# Altium PCB imu_evo.PcbDoc (part 1 of 2)
Units mil, origin at the board's own origin, x right, y up, seen from the top; angles counter-clockwise.
Board outline 2362.2 x 1574.8 mil, 3 copper layers (Top Layer, Mid-Layer 1, Bottom Layer); 55 components, 35 nets, 218 pads, 127 vias.
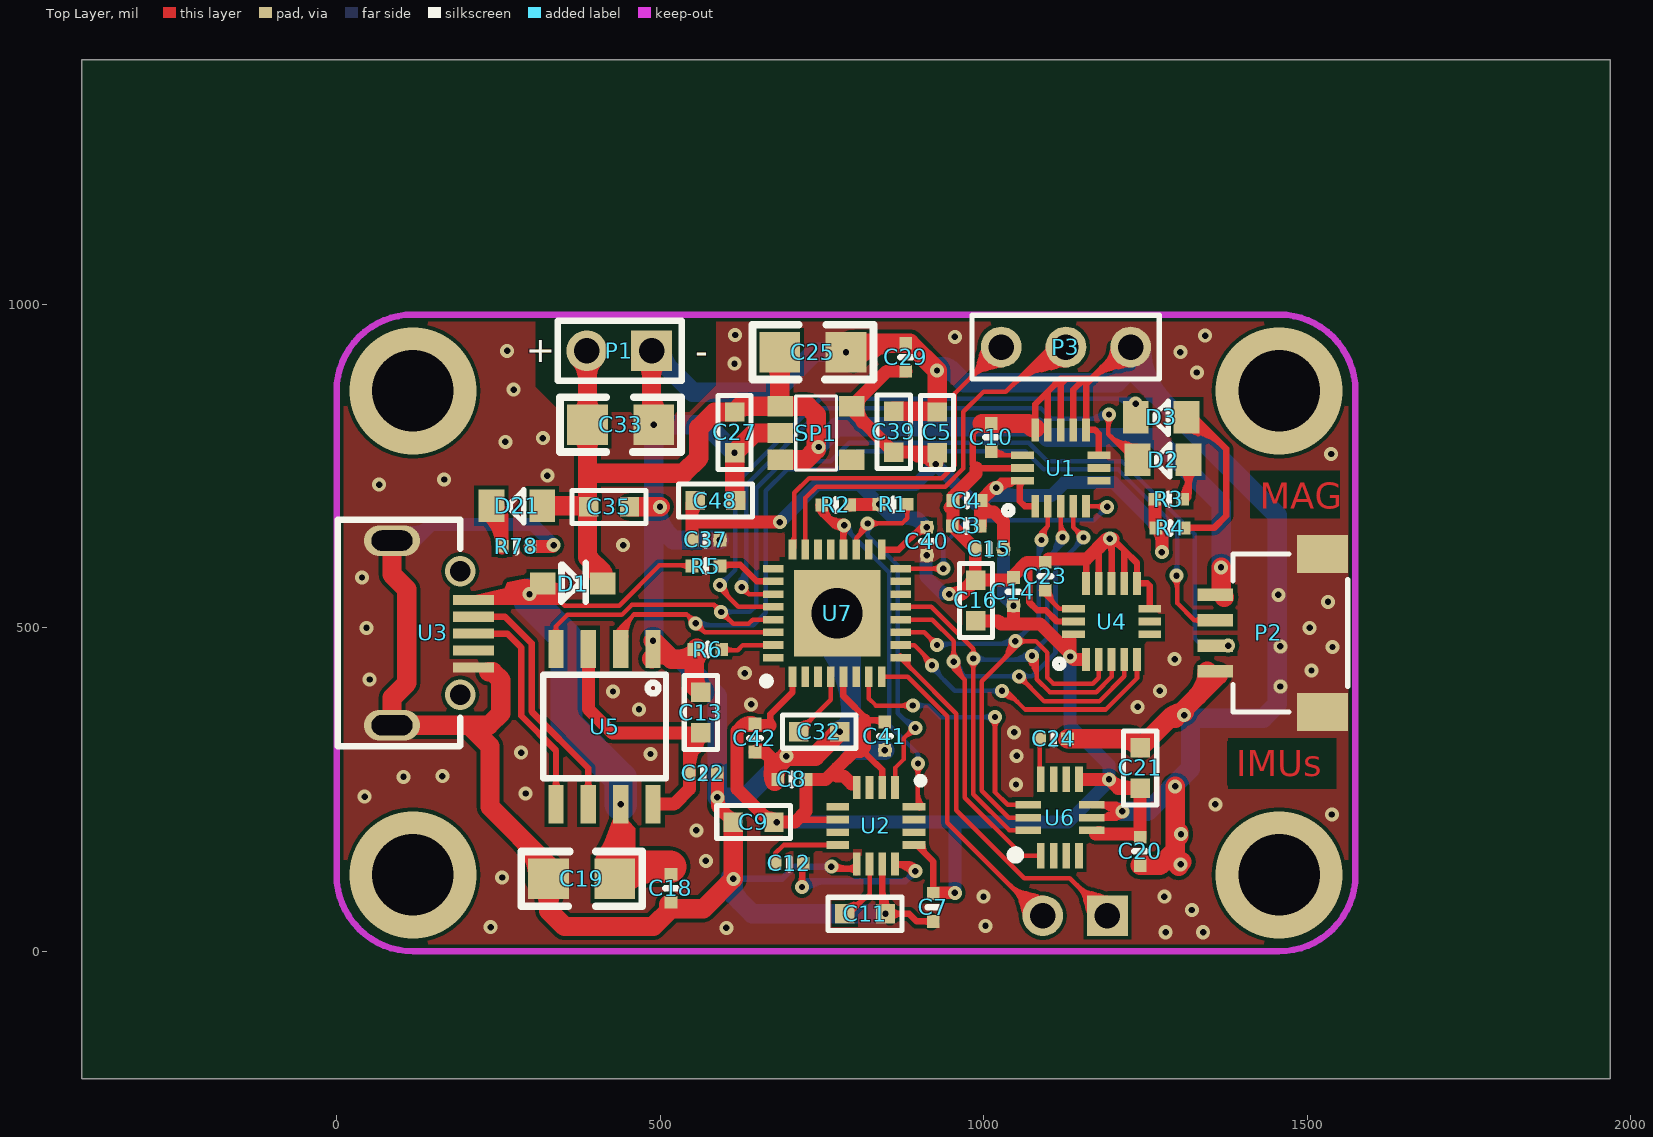
[diagram p0: Top Layer view]
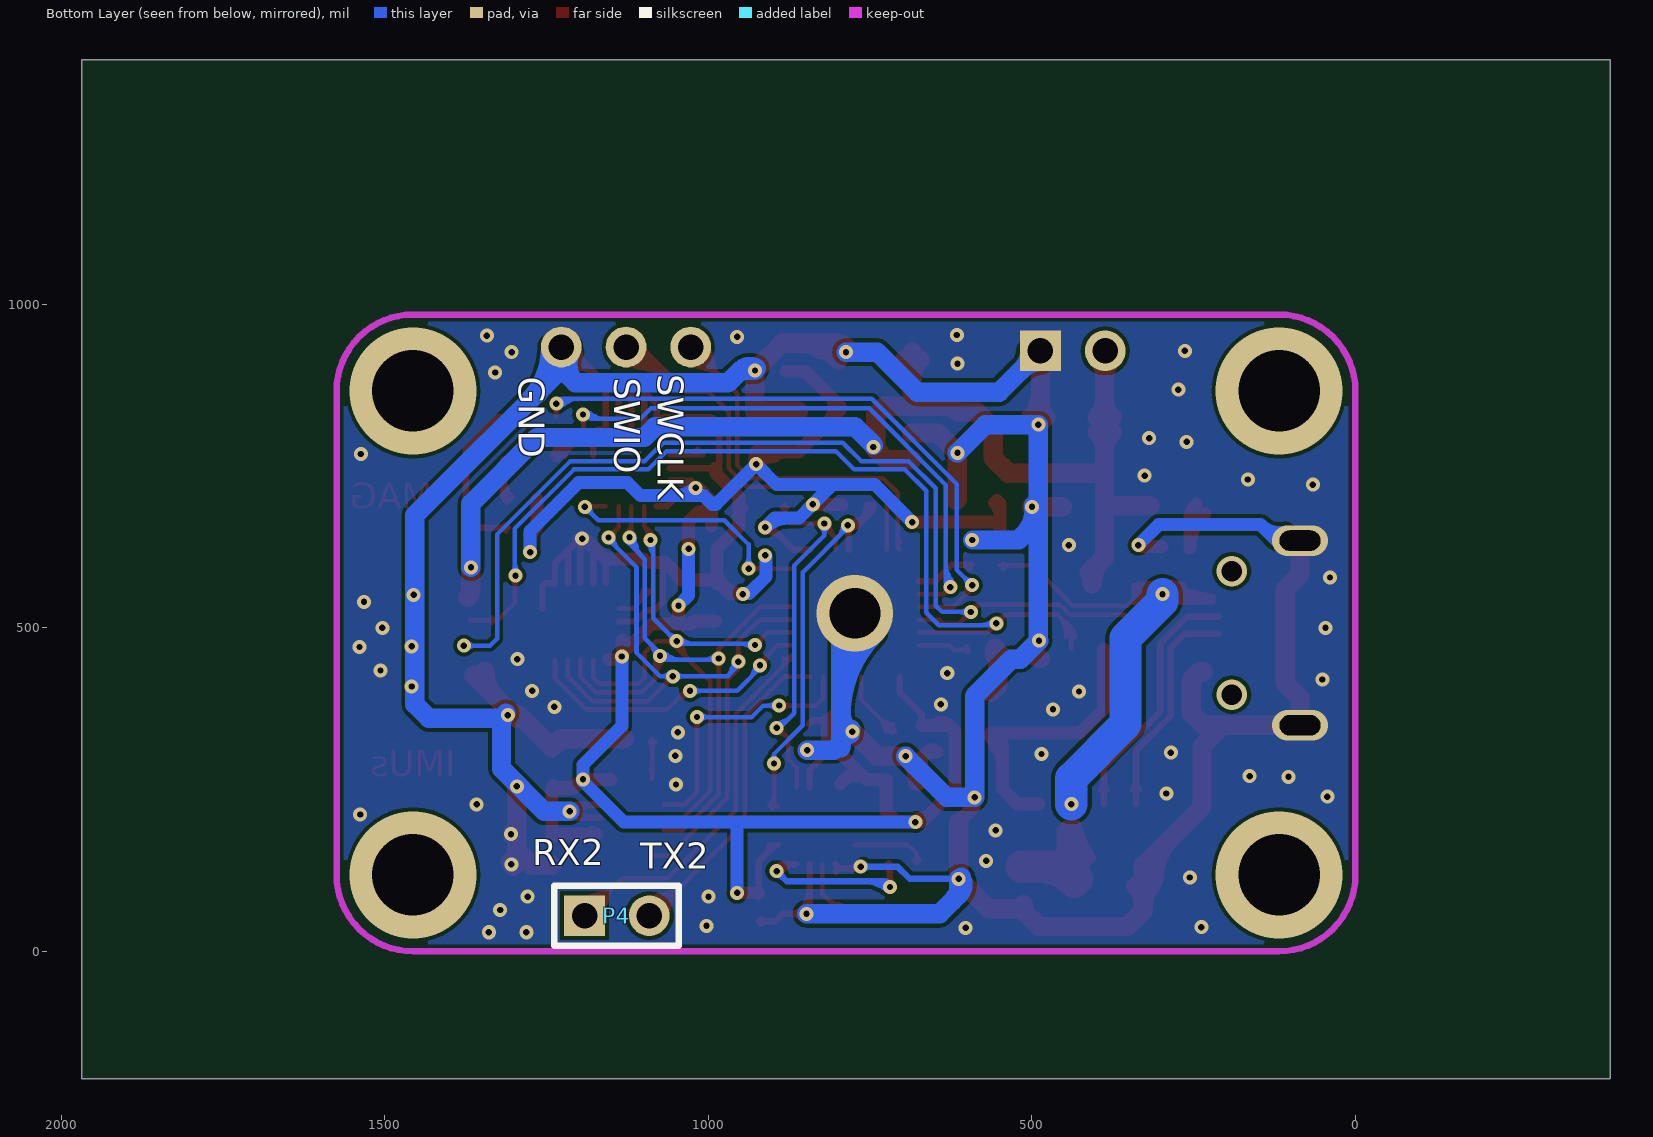
[diagram p1: Bottom Layer view, seen from below]

## Layer stack, top to bottom
Top Layer: signal copper 1.4
Dielectric: dielectric 12.6, FR-4, Dk 4.8
Mid-Layer 1: signal copper 1.4
Dielectric: dielectric 12.6, FR-4, Dk 4.8
Bottom Layer: signal copper 1.4

## Board outline
-393.7,1377.95 1968.5,1377.95 1968.5,-196.85 -393.7,-196.85

## Design rules (kind name [scope] priority, off if disabled: settings)
Clearance [All] p1: gap=6
ComponentClearance [All] p1: gap=0 collisioncheckmode=3 verticalgap=0 showdistances=FALSE
HoleSize [All] p1: absolutevalues=TRUE maxlimit=1000 minlimit=1 maxpercent=80.000 minpercent=20.000
HoleToHoleClearance [All] p1: gap=0 allowstackedmicrovias=FALSE
MinimumSolderMaskSliver [All] p1: minsoldermaskwidth=0
PlaneConnect [All] p1: planeconnectstyle=Direct reliefexpansion=20 reliefentries=4 reliefconductorwidth=10 reliefairgap=10
PolygonConnect [All] p1: connectstyle=Direct reliefconductorwidth=10 reliefentries=4 polygonreliefangle="90 Angle" airgapwidth=10
RoutingLayers [All] p1: top layer_v5=TRUE mid layer 1_v5=FALSE bottom layer_v5=TRUE
RoutingVias [All] p1: holewidth=9.84 width=21.65 viastyle="Through Hole" minholewidth=9.84 minwidth=21.65 maxholewidth=19.68 maxwidth=59.06
SilkToSilkClearance [All] p1: silktosilkclearance=0
SilkToSolderMaskClearance [IsPad] p1: minsilkscreentomaskgap=0 clearancetoexposedcopper=TRUE
SolderMaskExpansion [All] p1: expansion=4
Width [All] p1: maxlimit=100 minlimit=7 preferedwidth=10 toplayer_prefwidth=7 midlayer1_minwidth=10 midlayer1_maxwidth=10 bottomlayer_prefwidth=7 minimp=50.000000 maximp=50.000000 favimp=50.000000
20 further rules are at their usual default settings.

## Components (designator, comment, footprint, x,y, rotation, side; value= is the part's Value field where it differs from the comment)
C3 "104" 0402 995.08,657.48 r180 top
C4 "104" 0402 996.06,696.85 r180 top
C5 "C1uF" 0603C 928.15,833.66 r270 top
C7 "104" 0402 922.24,89.57 r270 top
C8 "104" 0402 725.39,265.75 r180 top
C9 "C1uF" 0603C 613.19,199.8 r0 top
C10 "104" 0402 1011.81,815.94 r270 top
C11 "4.7UF" 0603C 785.43,58.07 r0 top
C12 "0.22UF" 0402 721.45,135.83 r180 top
C13 "105" 0603C 562.99,400.59 r270 top
C14 "104" 0402 1046.26,534.45 r90 top
C15 "104" 0402 1030.51,622.05 r180 top
C16 "C1uF" 0603C 988.19,573.82 r270 top
C18 "104" 0402 516.73,119.09 r270 top
C19 "47UF" 1206 430.12,112.2 r180 top
C20 "104" 0402 1242.13,176.18 r270 top
C21 "C1uF" 0603C 1242.13,314.96 r270 top
C22 "104" 0402 545.28,275.59 r0 top
C23 "104" 0402 1095.47,601.38 r270 top
C24 "104" 0402 1086.61,328.74 r0 top
C25 "47UF" 1206 685.04,926.18 r0 top
C27 "104" 0603C 615.16,770.67 r90 top
C29 "104" 0402 879.92,939.96 r270 top
C32 "C1uF" 0603C 777.56,339.57 r180 top
C33 "47UF" 1206 387.8,813.98 r0 top
C35 "104" 0603C 452.76,687.01 r180 top
C37 "104" 0402 592.52,635.83 r180 top
C39 "22uF" 0603C 861.22,771.65 r90 top
C40 "104" 0402 912.4,655.51 r270 top
C41 "104" 0402 847.44,354.33 r270 top
C42 "104" 0402 646.65,351.38 r270 top
C48 "22uF" 0603C 554.13,696.85 r0 top
D1 "BAT54WS" LC-SOD-323F 365.16,568.9 r180 top
D2 "LED-G" LED 1316.93,759.84 r180 top
D3 "LED-B" LED 1313.98,825.79 r180 top
D21 "LED-R" LED 317.91,688.98 r180 top
P1 "Head2" HEAD2 386.81,928.15 r270 top
P2 "Head*4" B2BC-1.0-4P 1385.83,370.08 r0 top
P3 "head*3" "head*3 - duplicate" 1227.36,934.06 r270 top
P4 "Head2" HEAD2 1091.54,55.12 r90 bottom
R1 "R2K" 0402 881.89,690.94 r180 top
R2 "R2K" 0402 750,689.96 r0 top
R3 "R2K" 0402 1264.76,698.82 r0 top
R4 "R2K" 0402 1266.73,654.53 r0 top
R5 "R10K" 0402 592.52,595.47 r180 top
R6 "R10K" 0402 595.47,466.54 r180 top
R78 "R4.7K" 0402 255.91,625.98 r0 top
SP1 "SP6201-3-3" SOT23-5 686.02,842.52 r270 top
U1 "ICM20602" LGA16 1060.04,687.99 r90 top
U2 "QMC5883" LGA16-Quad 863.19,252.95 r270 top
U3 "Micro USB" Micro_USB_t 190.94,587.6 r180 top
U4 "ICM20602" LGA16 1138.78,450.79 r90 top
U5 "HT42B534" SOP-8 489.17,467.52 r270 top
U6 "ICM20600" LGA14 1068.9,147.64 r90 top
U7 "STM32F031KxU6" QFN32 704.72,424.21 r90 top

## Footprints (in the part's own frame and the unit in brackets; to place one, negate y for a bottom-side part, rotate by r counter-clockwise, add the part's x,y. Pads: shape width x height; smd on the part's side, far side on the other; paste and mask are expansions set on the pad)
0402 [mm]
  rect 0.5x0.5 smd: 1(0,0) 2(1.1,0)
  silkscreen extent 0.55,-0.22 0.55,0.22
0603C [mil]
  rect 30x30 smd: 1(0,0) 2(62.99,0)
  silkscreen extent -26,-26 89,26
1206 [mm]
  rect 1.6x1.6 smd: 1(0,0) 2(2.6,0)
  silkscreen extent -1.08,-1.08 3.68,1.07
B2BC-1.0-4P [mm]
  rect 2x1.5 smd: 0(3.5,0) 0(3.5,6.2)
  rect 1.4x0.5 smd: 1(-0.7,1.6) 2(-0.7,2.6) 3(-0.7,3.6) 4(-0.7,4.6)
  silkscreen extent 0,0 4.5,6.2
HEAD2 [mm]
  rect 1.6x1.6 hole 1: 1(0,2.54)
  round 1.6 hole 1: 2(0,0)
  silkscreen extent -1.18,-1.15 1.18,3.72
"head*3 - duplicate" [mm]
  round 1.6 hole 1: 1(0,0) 2(0,-2.54) 3(0,-5.08)
  silkscreen extent -1.25,-6.23 1.25,1.12
LC-SOD-323F [mm]
  rect 1x0.83 smd: 1(1.18,0.025) 1(1.18,0) 2(-1.18,0) 2(-1.18,0.025)
  silkscreen extent -0.5,-0.8 0.45,0.72, body extent -1.4,-0.67 1.4,0.68, height 0.75
LED [mil]
  rect 40x50 smd: 1(0,0) 2(78.74,0)
  silkscreen extent 29,-25 49,27
LGA14 [mm]
  rect 1x0.3 smd: 1(0,-0.5) 2(0,-1) 3(0,-1.5) 4(0,-2) 8(3,-2) 9(3,-1.5) 10(3,-1) 11(3,-0.5)
  rect 0.3x1 smd: 5(1,-2.5) 6(1.5,-2.5) 7(2,-2.5) 12(2,0) 13(1.5,0) 14(1,0)
  silkscreen extent -0.18,0.28 0.25,0.71
LGA16 [mm]
  rect 0.9x0.3 smd: 1(0,-0.5) 2(0,-1) 3(0,-1.5) 4(0,-2) 5(0,-2.5) 9(3,-2.5) 10(3,-2) 11(3,-1.5) 12(3,-1) 13(3,-0.5)
  rect 0.3x0.9 smd: 6(1,-3) 7(1.5,-3) 8(2,-3) 14(2,0) 15(1.5,0) 16(1,0)
  silkscreen extent -0.32,0.39 0,0.71
LGA16-Quad [mm]
  rect 0.9x0.3 smd: 1(0,0) 2(0,-0.5) 3(0,-1) 4(0,-1.5) 9(3,-1.5) 10(3,-1) 11(3,-0.5) 12(3,0)
  rect 0.3x0.9 smd: 5(0.75,-2.25) 6(1.25,-2.25) 7(1.75,-2.25) 8(2.25,-2.25) 13(2.25,0.75) 14(1.75,0.75) 15(1.25,0.75) 16(0.75,0.75)
  silkscreen extent -0.42,0.86 -0.13,1.14
Micro_USB_t [mm]
  round 1.2 hole 0.8: 0(-0.005,4.85) 0(-0.005,0)
  oval 2.2x1.2 hole 0.8 slot 1.6 at 0 deg: 0(2.675,6.05) 0(2.675,-1.2)
  rect 1.6x0.4 smd: 1(-0.525,1.125) 2(-0.525,1.787) 3(-0.525,2.45) 4(-0.525,3.112) 5(-0.525,3.775)
  silkscreen extent 0,-2.03 4.8,6.87
QFN32 [mm]
  rect 3.4x3.4 smd: 0(2.5,-1.75)
  rect 0.8x0.3 smd: 1(0,0) 2(0,-0.5) 3(0,-1) 4(0,-1.5) 5(0,-2) 6(0,-2.5) 7(0,-3) 8(0,-3.5) 17(5,-3.5) 18(5,-3) 19(5,-2.5) 20(5,-2) 21(5,-1.5) 22(5,-1) 23(5,-0.5) 24(5,0)
  rect 0.3x0.8 smd: 9(0.75,-4.25) 10(1.25,-4.25) 11(1.75,-4.25) 12(2.25,-4.25) 13(2.75,-4.25) 14(3.25,-4.25) 15(3.75,-4.25) 16(4.25,-4.25) 25(4.25,0.75) 26(3.75,0.75) 27(3.25,0.75) 28(2.75,0.75) 29(2.25,0.75) 30(1.75,0.75) 31(1.25,0.75) 32(0.75,0.75)
  silkscreen extent -0.3,0.88 -0.03,1.16
SOP-8 [mm]
  rect 1.5x0.6 smd: 1(0,0) 2(0,-1.27) 3(0,-2.54) 4(0,-3.81) 5(6.096,-3.81) 6(6.096,-2.54) 7(6.096,-1.27) 8(6.096,0)
  silkscreen extent 1.02,-4.32 5.08,0.51
SOT23-5 [mm]
  rect 0.8x1 smd: 1(0,0) 2(1.05,0) 3(2.1,0) 4(2.1,2.8) 5(0,2.8)
  silkscreen extent -0.4,0.6 2.5,2.2

## Part data
C3 C4 C5 C7 C8 C9 C10 C11 C12 C13 C14 C15 C16 C18 C20 C21 C22 C23 C24 C27 C29 C32 C35 C37 C40 C41 C42: library part C0.1uF
C19 C25 C33 C39 C48: library part C100uF
D1: library part Diode
D2 D3 D21: library part LED
R1 R2 R3 R4 R78: library part R10K
SP1: library part SP6201
U3: library part "MINI USB"

## Via types
v1: diameter 21.65, hole 9.84, Top Layer to Bottom Layer, tented both sides, 119 vias
v2: diameter 196.85, hole 125.98, Top Layer to Bottom Layer, tented both sides, 4 vias
v3: diameter 21.65, hole 9.84, Top Layer to Bottom Layer, 3 vias
v4: diameter 118.11, hole 78.74, Top Layer to Bottom Layer, tented both sides, 1 vias

## Nets (pads, with @x,y where several pads share a name; then routed paths per layer and width w, separated by ;. In a path a pad name is that pad's centre, name@x,y a point inside that pad or via, vN(x,y) a via of type N, cw(c..) or ccw(c..) an arc to the next point about the centre after c; other vN are vias at no path point)
4V3: C25.1 C27.2 C33.1 C35.2 D1.2 D21.1 P1.2 P2.4 SP1.1 SP1.3 | length 2629.8
  Top Layer w30: D21.1@317.91,688.98 C35.2@385.83,688.98 ; P1.2@386.81,928.15 387.8,927.17 C33.1@387.8,813.98 387.8,739.17 ; 411.61,585.43 387.8,609.25 387.8,739.17 ; C25.1@685.04,926.18 685.04,843.5 SP1.1@686.02,842.52 ; SP1.3@686.02,759.84 725.39,759.84 741.14,775.59 741.14,829.72 728.35,842.52 SP1.1@686.02,842.52 ; 1367.13,562.99 v1(1367.13,593.5) ; 387.8,739.17 536.42,739.17 560.04,762.8 560.04,809.06 584.65,833.66 C27.2@615.16,833.66 ; 387.8,774.15 cw(c427.62,774.15) 399.46,802.31 ccw(c427.62,774.15) 387.8,774.15 ; 387.8,774.15 ccw(c347.97,774.15) 376.13,802.31 cw(c347.97,774.15) 387.8,774.15 ; 387.8,853.8 cw(c347.97,853.8) 376.13,825.64 ccw(c347.97,853.8) 387.8,853.8 ; 387.8,853.8 ccw(c427.62,853.8) 399.46,825.64 cw(c427.62,853.8) 387.8,853.8 ; C27.2@615.16,833.66 cw(c636.54,812.28) 636.54,842.52 ccw(c636.54,812.28) C27.2@615.16,833.66 ; C27.2@615.16,833.66 624.02,842.52 SP1.1@686.02,842.52 ; 685.04,886.36 cw(c724.86,886.36) 696.7,914.52 ccw(c724.86,886.36) 685.04,886.36 ; 685.04,886.36 ccw(c645.21,886.36) 673.38,914.52 cw(c645.21,886.36) 685.04,886.36 ; P2.4@1367.13,560.11 ccw(c1384.91,560.11) P2.4@1372.34,547.53 ; P2.4@1367.13,560.11 ccw(c1384.91,560.11) P2.4@1372.34,547.53 ; P2.4@1367.13,560.11 ccw(c1384.91,560.11) P2.4@1372.34,547.53 ; P2.4@1367.13,560.11 ccw(c1384.91,560.11) P2.4@1372.34,547.53 ; P1.2@375.15,916.49 cw(c344.61,885.95) 387.8,885.95 ccw(c344.61,885.95) P1.2@375.15,916.49 ; 387.8,890.7 cw(c424.26,890.7) 398.48,916.49 ccw(c424.26,890.7) 387.8,890.7 ; 391.23,605.82 cw(c353.32,567.91) 406.93,567.91 ccw(c353.32,567.91) 391.23,605.82 ; 391.92,605.12 cw(c355.7,568.9) 406.93,568.9 ccw(c355.7,568.9) 391.92,605.12
  Bottom Layer w30: v1@745.08,782.37 773.48,810.78 1082.72,810.78 1099.21,794.29 1264.76,794.29 1367.13,691.93 v1(1367.13,593.5)
  other v1: 745.08,779.53
D+: U3.3 U5.5 | length 398.7
  Top Layer w10: U3.3@211.61,491.14 263.79,491.14 285.43,469.5 285.43,364.18 339.17,310.44 U5.5@339.17,227.52 ; 339.17,261.68 cw(c322.73,261.68) 334.36,250.05 ccw(c322.73,261.68) 339.17,261.68 ; 339.17,261.68 ccw(c355.62,261.68) 343.99,250.05 cw(c355.62,261.68) 339.17,261.68
D-: U3.2 U5.6 | length 443.5
  Top Layer w10: U3.2@211.61,517.23 260.33,517.23 301.43,476.13 301.43,370.81 389.17,283.07 U5.6@389.17,227.52 ; 389.17,261.68 cw(c372.73,261.68) 384.36,250.05 ccw(c372.73,261.68) 389.17,261.68 ; 389.17,261.68 ccw(c405.62,261.68) 393.99,250.05 cw(c405.62,261.68) 389.17,261.68
GND: C3.2 C4.2 C5.1 C7.2 C8.2 C9.1 C10.1 C11.2 C13.1 C14.2 C15.2 C16.1 C18.2 C19.2 C20.2 C21.1 C22.2 C23.1 C24.2 C25.2 C27.1 C29.1 C32.1 C33.2 C35.1 C37.1 C39.2 C40.2 C41.2 C42.2 C48.2 P1.1 P2.0 P2.1 P3.1 R6.2 R78.2 SP1.2 U1.8 U1.9 U1.10 U1.11 U1.12 U1.13 U1.15 U2.9 U2.11 U3.0@85.63,349.41 U3.0@85.63,634.84 U3.5 U4.8 U4.9 U4.10 U4.11 U4.12 U4.13 U4.15 U5.1 U6.6 U6.7 U7.0 | length 14248.6
  Top Layer w10: v1(764.8,130.91) 767.76,127.95 797.24,127.95 ; 795.86,128.32 cw(c792.67,116.42) U2.9@803.35,122.58 ; U2.9@804.13,134.84 797.24,127.95 ; U2.11@843.5,134.84 843.5,62.99 v1(848.42,58.07) 884.84,58.07 896.65,46.26 C7.2@922.24,46.26 ; C11.2@844.5,62.38 ccw(c838.6,68.84) 846.18,73.22 ; 989.85,807.71 ccw(c985.49,835.02) C10.1@1007.89,818.79 ; 998.03,815.95 983.27,801.18 ; U1.15@1060.04,747.05 989.17,747.05 983.27,752.95 983.27,801.18 ; 1066.93,601.38 1070.87,597.44 1070.87,539.37 1083.08,527.16 1096.06,527.16 1113.38,509.84 U4.15@1138.78,509.84 ; U1.13@1079.72,815.94 1079.72,845.47 1099.41,865.16 ; U1.12@1099.41,806.1 1099.41,865.16 ; U1.11@1119.09,806.1 1119.09,876.97 1126.97,884.84 ; U1.10@1138.78,806.1 1138.78,868.11 1155.51,884.84 ; U4.13@1158.47,568.9 1158.47,605.76 ; U6.6@1167.32,206.69 1204.72,206.69 ; U6.7@1167.32,226.38 1204.72,226.38 ; U4.12@1178.15,568.9 1178.15,616.14 1197.83,635.83 U4.11@1197.83,568.9 ; U1.8@1178.15,766.73 1178.15,800.2 1172.25,806.1 U1.9@1158.46,806.1 1158.46,876.97 1166.34,884.84 ; 1188.72,899.82 ccw(c1176.41,958.6) P3.1@1230.52,932.53 ; 1191.89,209.94 cw(c1203.32,190.15) v1@1212.28,211.18 ; 1191.89,223.13 ccw(c1203.32,242.92) v1@1212.28,221.9 ; 1194.03,910.8 ccw(c1186.68,945.92) P3.1@1221.13,935.87 ; 1195.01,912.2 cw(c1228.07,903.34) P3.1@1227.28,937.56 ; v1@1199.8,637.8 1217.52,620.08 ; 1204.96,206.33 ccw(c1200.83,213.47) v1@1208.88,215.27 ; 1204.96,226.74 cw(c1200.83,219.6) v1@1208.88,217.8 ; 1208.59,903.98 ccw(c1199.48,947.49) P3.1@1239.53,928.19 ; U4.10@1217.52,568.9 1217.52,620.08 ; P3.1@1227.36,934.06 1215.55,934.06 1166.34,884.84 ; U4.8@1256.89,529.53 1256.89,564.96 1252.95,568.9 U4.9@1237.21,568.9 1237.21,600.39 1217.52,620.08 ; 797.24,127.95 cw(c797.24,121.87) 803.24,122.88 ccw(c797.24,121.87) 797.24,127.95 ; C11.2@844.74,62.58 ccw(c836.76,72.36) 847.69,78.67 ; C11.2@844.74,62.58 ccw(c836.76,72.36) 847.69,78.67 ; C11.2@844.74,62.58 ccw(c836.76,72.36) 847.69,78.67 ; C11.2@851.06,54.84 ccw(c844.29,63.13) C11.2@853.56,68.49 ; C11.2@851.06,54.84 ccw(c844.29,63.13) C11.2@853.56,68.49 ; C11.2@851.06,54.84 ccw(c844.29,63.13) C11.2@853.56,68.49 ; C11.2@852.54,62.19 ccw(c862.49,72.14) C11.2@862.49,58.07 ; C11.2@852.54,62.19 cw(c874.37,84.02) 843.5,84.02 ccw(c874.37,84.02) C11.2@852.54,62.19 ; C11.2@852.54,62.19 ccw(c862.49,72.14) C11.2@862.49,58.07 ; C11.2@855.49,65.14 ccw(c872.57,82.21) 872.57,58.07 ; C11.2@855.49,65.14 cw(c884.45,94.1) 843.5,94.1 ccw(c884.45,94.1) C11.2@855.49,65.14 ; C11.2@855.49,65.14 ccw(c872.57,82.21) 872.57,58.07 ; C11.2@862.49,58.07 ccw(c862.49,44) 852.54,53.95 cw(c862.49,44) C11.2@862.49,58.07 ; 872.57,58.07 ccw(c872.57,33.93) 855.49,51 cw(c872.57,33.93) 872.57,58.07 ; 910.55,46.26 cw(c910.55,34.57) 918.82,42.84 ccw(c910.55,34.57) 910.55,46.26 ; 910.55,46.26 ccw(c910.55,57.95) 918.82,49.68 cw(c910.55,57.95) 910.55,46.26 ; 983.27,801.18 cw(c1007.73,776.72) 1011.31,811.13 ccw(c1007.73,776.72) 983.27,801.18 ; 1099.41,865.16 1119.09,884.84 1126.97,884.84 ; 1126.97,884.84 1155.51,884.84 ; 1155.51,884.84 1166.34,884.84 ; 1166.34,884.85 cw(c1221.56,829.62) 1225.89,907.6 ccw(c1221.56,829.62) 1166.34,884.85 ; 1204.73,206.69 cw(c1214.42,197) 1214.52,210.71 ccw(c1214.42,197) 1204.73,206.69 ; 1204.73,206.69 ccw(c1195.03,216.39) 1208.74,216.49 cw(c1195.03,216.39) 1204.73,206.69 ; 1204.72,206.69 v1(1214.57,216.54) 1204.72,226.38 ; 1204.73,226.38 cw(c1195.03,216.68) 1208.74,216.58 ccw(c1195.03,216.68) 1204.73,226.38 ; 1204.73,226.38 ccw(c1214.42,236.07) 1214.52,222.36 cw(c1214.42,236.07) 1204.73,226.38 ; v1@768.92,135.03 ccw(c786.01,152.12) 786.01,127.95 cw(c786.01,152.12) v1@768.92,135.03 ; 790.07,127.95 cw(c790.07,108.97) 803.49,122.39 ccw(c790.07,108.97) 790.07,127.95 ; 998.11,816.03 cw(c1010.53,803.61) 1012.34,821.08 ccw(c1010.53,803.61) 998.11,816.03 ; U6.6@1176.74,206.69 ccw(c1176.74,254.36) 1210.45,220.66 cw(c1176.74,254.36) U6.6@1176.74,206.69 ; U6.7@1176.74,226.38 cw(c1176.74,178.71) 1210.45,212.42 ccw(c1176.74,178.71) U6.7@1176.74,226.38 ; 1181.91,619.91 ccw(c1164.02,637.8) 1189.32,637.8 cw(c1164.02,637.8) 1181.91,619.91 ; 1182.16,900.66 cw(c1223.23,859.59) 1226.45,917.58 ccw(c1223.23,859.59) 1182.16,900.66 ; 1190.48,908.99 ccw(c1165.42,934.06) 1200.87,934.06 cw(c1165.42,934.06) 1190.48,908.99 ; v1@1191.03,633.68 cw(c1174.6,617.25) 1197.83,617.25 ccw(c1174.6,617.25) v1@1191.03,633.68 ; v1@1195.15,631.97 cw(c1195.15,606.67) 1213.04,624.56 ccw(c1195.15,606.67) v1@1195.15,631.97 ; 1197.97,916.48 cw(c1224.89,889.56) 1227,927.57 ccw(c1224.89,889.56) 1197.97,916.48 ; 1200.88,206.69 ccw(c1200.88,230.22) 1217.52,213.58 cw(c1200.88,230.22) 1200.88,206.69 ; 1200.88,226.38 cw(c1200.88,202.85) 1217.52,219.49 ccw(c1200.88,202.85) 1200.88,226.38
  Top Layer w20: R78.2@299.21,625.98 333.66,625.98 v3(335.63,627.95) ; C22.2@588.58,275.59 588.58,224.41 C9.1@613.19,199.8 ; 596.95,218.09 ccw(c621.96,232.53) C9.1@614.48,204.63 ; C42.2@646.65,308.07 662.4,308.07 ; 670.28,270.67 670.28,300.2 ; 947.83,686.02 952.76,690.94 952.76,656.5 C15.2@987.2,622.05 987.2,574.8 C16.1@988.19,573.82 ; C4.2@952.76,696.85 952.76,702.74 988.27,738.25 988.27,746.14 989.17,747.05 ; 969.76,558.98 cw(c990.78,541.73) C16.1@988.59,568.83 ; C16.1@974.05,562.99 ccw(c964.07,580.28) C16.1@983.36,575.11 ; C23.1@1088.58,601.38 1066.93,601.38 1046.26,580.71 C14.2@1046.26,577.76 1042.32,573.82 C16.1@988.19,573.82 ; C23.1@1095.47,601.38 1100.39,606.3 1157.93,606.3 1158.47,605.76 1190.5,637.8 v1@1199.8,637.8 ; 662.4,308.07 ccw(c654.42,300.08) 646.54,308.18 cw(c654.42,300.08) 662.4,308.07 ; 662.4,308.07 670.28,300.2 ; 670.28,300.2 ccw(c650.31,280.23) 646.63,308.23 cw(c650.31,280.23) 670.28,300.2 ; v3(946.85,552.17) ccw(c946.85,592.55) 983.63,575.88 cw(c946.85,592.55) v3(946.85,552.17) ; v3(946.85,552.17) 966.54,552.17 C16.1@988.19,573.82 ; v1@589.41,238.19 ccw(c624.67,238.19) 599.74,213.25 cw(c624.67,238.19) v1@589.41,238.19 ; 670.28,293.88 ccw(c710.22,293.88) 681.98,265.64 cw(c710.22,293.88) 670.28,293.88 ; v3@946.85,552.99 ccw(c946.85,602.51) 981.87,567.5 cw(c946.85,602.51) v3@946.85,552.99 ; C4.2@948.85,687.04 ccw(c939.04,696.85) 952.91,696.85 cw(c939.04,696.85) C4.2@948.85,687.04 ; C4.2@952.6,696.85 cw(c966.44,696.85) 956.65,706.63 ccw(c966.44,696.85) C4.2@952.6,696.85 ; C14.2@1037.13,573.82 ccw(c1037.13,586.88) 1046.37,577.65 cw(c1037.13,586.88) C14.2@1037.13,573.82 ; C23.1@1095.36,601.49 cw(c1106.97,589.88) 1106.97,606.3 ccw(c1106.97,589.88) C23.1@1095.36,601.49
  Top Layer w30: U3.0@85.63,634.84 85.63,582.68 108.76,559.55 108.76,414.86 85.63,391.73 U3.0@85.63,349.41 235.24,349.41 253.94,368.11 253.94,419.29 241.14,432.09 U3.5@235.24,432.09 ; 204.72,349.41 237.2,316.93 237.2,223.43 327.75,132.88 C19.2@327.75,112.2 327.75,62.99 352.36,38.39 489.17,38.39 516.73,65.94 566.93,65.94 v1(613.19,112.2) C9.1@613.19,199.8 ; C35.1@452.75,687.01 v1(500,687.01) ; P1.1@486.81,928.15 486.81,817.32 v1(490.16,813.98) ; v1(489.17,480.32) 517.72,451.77 ; C48.2@617.13,696.85 615.16,698.82 v1(615.16,770.67) 645.67,801.18 SP1.2@686.02,801.18 ; v1(777.56,339.57) 739.66,301.67 v1(695.2,301.67) 680.93,287.4 ; v1(787.4,926.18) C25.2@801.18,939.96 ; C25.2@799.66,937.22 ccw(c817.83,953.56) 830.04,932.4 ; C39.2@861.22,834.65 927.16,834.65 C5.1@928.15,833.66 v1(928.15,897.81) 886,939.96 C29.1@879.92,939.96 C25.2@801.18,939.96 ; 998.03,815.95 C10.1@1011.81,815.95 1068.9,815.95 ; C24.2@1129.92,328.74 1228.35,328.74 C21.1@1242.13,314.96 ; C20.2@1242.13,132.87 1272.64,132.87 ; v1(1296.26,254.92) 1296.26,156.5 1272.64,132.87 ; P2.1@1362.7,426.67 1296.26,360.24 1287.4,360.24 ; 327.75,72.38 cw(c367.58,72.38) 339.42,100.54 ccw(c367.58,72.38) 327.75,72.38 ; 327.75,72.38 ccw(c287.93,72.38) 316.09,100.54 cw(c287.93,72.38) 327.75,72.38 ; 486.81,888.32 cw(c526.64,888.32) 498.48,916.49 ccw(c526.64,888.32) 486.81,888.32 ; 486.81,888.32 ccw(c446.99,888.32) 475.15,916.49 cw(c446.99,888.32) 486.81,888.32 ; 517.72,451.77 ccw(c502.17,436.23) 486.97,452.11 cw(c502.17,436.23) 517.72,451.77 ; 517.72,451.77 554.13,451.77 553.15,450.79 ; 553.15,450.79 ccw(c541.37,462.57) 557.01,468.31 cw(c541.37,462.57) 553.15,450.79 ; 553.15,450.79 553.15,410.43 C13.1@562.99,400.59 ; C13.1@562.99,400.59 cw(c586.75,424.35) 553.15,424.35 ccw(c586.75,424.35) C13.1@562.99,400.59 ; 680.93,287.4 ccw(c695.23,273.11) 677.59,263.23 cw(c695.23,273.11) 680.93,287.4 ; C25.2@801.18,939.96 ccw(c801.18,921.1) 783.49,927.62 cw(c801.18,921.1) C25.2@801.18,939.96 ; 1073.41,811.43 ccw(c1079.72,817.75) U1.13@1079.72,808.82 ; 1073.41,811.43 ccw(c1079.72,817.75) U1.13@1079.72,808.82 ; 1073.41,811.43 ccw(c1079.72,817.75) U1.13@1079.72,808.82 ; 1073.41,811.43 ccw(c1079.72,817.75) U1.13@1079.72,808.82 ; C21.1@1242.13,314.96 ccw(c1208.86,281.7) 1208.86,328.74 cw(c1208.86,281.7) C21.1@1242.13,314.96 ; C21.1@1242.13,314.96 1287.4,360.24 ; 1272.64,132.87 cw(c1293.21,112.3) 1306.44,138.21 ccw(c1293.21,112.3) 1272.64,132.87 ; 1287.4,360.24 cw(c1309.38,338.26) 1310.14,369.33 ccw(c1309.38,338.26) 1287.4,360.24 ; 1296.26,144.41 ccw(c1314.45,144.41) v1@1301.59,131.54 ; 1296.26,144.41 ccw(c1314.45,144.41) v1@1301.59,131.54 ; 1296.26,144.41 ccw(c1314.45,144.41) v1@1301.59,131.54 ; 1296.26,144.41 ccw(c1314.45,144.41) v1@1301.59,131.54 ; 284.98,175.65 cw(c221.53,112.2) 311.26,112.2 ccw(c221.53,112.2) 284.98,175.65 ; C33.2@478.49,825.64 ccw(c458.41,845.72) 486.81,845.72 cw(c458.41,845.72) C33.2@478.49,825.64 ; 486.81,861.88 ccw(c538.06,861.88) 501.82,825.64 cw(c538.06,861.88) 486.81,861.88 ; C18.2@513.09,72.14 ccw(c528.05,87.1) 528.05,65.94 cw(c528.05,87.1) C18.2@513.09,72.14 ; 528.97,451.77 ccw(c528.97,489.73) 555.81,462.89 cw(c528.97,489.73) 528.97,451.77 ; C8.2@676.93,265.75 cw(c719.55,265.75) 689.41,295.88 ccw(c719.55,265.75) C8.2@676.93,265.75 ; C25.2@784.45,929.13 cw(c810.59,902.99) 810.59,939.96 ccw(c810.59,902.99) C25.2@784.45,929.13 ; C25.2@799.07,914.52 cw(c860.49,853.09) 860.49,939.96 ccw(c860.49,853.09) C25.2@799.07,914.52 ; 1286.92,359.75 cw(c1310.04,336.63) 1310.04,369.33 ccw(c1310.04,336.63) 1286.92,359.75 ; 1296.26,169.79 cw(c1316.43,169.79) 1302.17,184.05 ccw(c1316.43,169.79) 1296.26,169.79 ; 1296.26,192.41 ccw(c1316.43,192.41) 1302.17,178.15 cw(c1316.43,192.41) 1296.26,192.41 ; 1329.17,393.15 ccw(c1289.25,433.07) 1345.71,433.07 cw(c1289.25,433.07) 1329.17,393.15
  Bottom Layer w10: v1(613.19,112.2) 688.98,112.2 707.68,130.91 v1(764.8,130.91) ; 627.26,112.2 cw(c627.26,126.27) 617.31,116.32 ccw(c627.26,126.27) 627.26,112.2 ; 627.26,112.2 ccw(c627.26,98.14) 617.31,108.08 cw(c627.26,98.14) 627.26,112.2 ; 750.73,130.91 cw(c750.73,116.85) 760.68,126.79 ccw(c750.73,116.85) 750.73,130.91 ; 750.73,130.91 ccw(c750.73,144.98) 760.68,135.03 cw(c750.73,144.98) 750.73,130.91
  Bottom Layer w20: U3.0@85.63,634.84 122.05,634.84 146.65,659.45 ; U3.0@108.21,648.15 ccw(c117.09,689.01) 146.65,659.45 ; v3(335.63,627.95) 304.13,659.45 146.65,659.45 ; v3(912.4,612.2) 911.17,610.97 911.17,579.19 v3@937.01,553.34 ; 930.65,559.7 ccw(c946.85,575.9) 946.85,552.99 cw(c946.85,575.9) 930.65,559.7
  Bottom Layer w30: P1.1@486.81,928.15 550.79,864.17 677.17,864.17 739.17,926.18 v1(787.4,926.18) ; v1@591.64,635.83 520.67,635.83 490.16,666.34 ; v1(613.19,112.2) 613.19,87.6 ; v1(615.16,770.67) 571.85,813.98 v1(490.16,813.98) 490.16,666.34 ; v1(695.2,301.67) 631.72,238.19 v1(588.58,238.19) 588.58,394.69 531.5,451.77 517.72,451.77 v1(489.17,480.32) 490.16,481.3 490.16,666.34 ; v4(773.62,522.64) 795.28,500.98 795.28,321.85 806.1,311.02 v1(847.44,311.02) ; v1(848.42,58.07) 642.72,58.07 613.19,87.6 ; v1(928.15,897.81) 950.51,897.81 ; v1(1214.57,216.54) 1253.94,216.54 1319.88,282.48 1319.88,360.24 1432.09,360.24 1453.74,381.89 1453.74,674.21 1227.36,900.59 1205.6,878.83 ; P3.1@1219.12,919.77 cw(c1172,838.17) 1263.02,862.55 ; 490.16,673.32 cw(c513.69,673.32) v1@497.05,689.96 ; 490.16,673.32 cw(c513.69,673.32) v1@497.05,689.96 ; 490.16,673.32 cw(c513.69,673.32) v1@497.05,689.96 ; 490.16,673.32 cw(c513.69,673.32) v1@497.05,689.96 ; 490.16,673.32 cw(c513.69,673.32) v1@497.05,689.96 ; 490.16,673.32 cw(c513.69,673.32) v1@497.05,689.96 ; P1.1@514.97,899.99 cw(c543.13,928.15) 503.31,928.15 ccw(c543.13,928.15) P1.1@514.97,899.99 ; P1.1@514.97,899.99 ccw(c486.81,871.83) 486.81,911.65 cw(c486.81,871.83) P1.1@514.97,899.99 ; 613.19,87.6 cw(c628.91,103.32) 609.56,114.26 ccw(c628.91,103.32) 613.19,87.6 ; 950.51,897.81 ccw(c935.85,883.15) 926.21,901.5 cw(c935.85,883.15) 950.51,897.81 ; 950.51,897.81 969.77,878.54 970.06,878.83 1205.6,878.83 ; 1205.6,878.83 ccw(c1176.98,907.45) 1212.78,926.35 cw(c1176.98,907.45) 1205.6,878.83 ; 490.16,700.69 ccw(c513.69,700.69) 497.05,684.06 cw(c513.69,700.69) 490.16,700.69 ; v1@495.83,687.01 ccw(c559.41,687.01) 514.45,642.05 cw(c559.41,687.01) v1@495.83,687.01 ; v1@609.02,112.2 ccw(c658.34,112.2) 623.46,77.32 cw(c658.34,112.2) v1@609.02,112.2 ; v4@742.47,491.49 cw(c614.99,364) 795.28,364 ccw(c614.99,364) v4@742.47,491.49 ; v4@763.68,512.7 cw(c687.41,436.43) 795.28,436.43 ccw(c687.41,436.43) v4@763.68,512.7 ; v1@779.84,343.06 cw(c761.16,314.51) 795.28,314.51 ccw(c761.16,314.51) v1@779.84,343.06 ; v1@780.51,336.62 ccw(c744.86,372.26) 795.28,372.26 cw(c744.86,372.26) v1@780.51,336.62 ; v1@928.15,901.98 cw(c928.15,858.08) 959.2,889.12 ccw(c928.15,858.08) v1@928.15,901.98 ; P3.1@1213.86,934.06 ccw(c1262.05,934.06) 1227.97,899.98 cw(c1262.05,934.06) P3.1@1213.86,934.06 ; P3.1@1243.86,934.06 ccw(c1364.47,934.06) 1279.19,848.77 cw(c1364.47,934.06) P3.1@1243.86,934.06 ; v1@1312.99,368.11 cw(c1296.35,351.47) 1319.88,351.47 ccw(c1296.35,351.47) v1@1312.99,368.11
  other v1: 1281.5,29.53 1339.57,29.53 602.36,36.42 238.19,37.4 1002.95,39.37 1321.85,63.98 1000,84.65 1279.53,84.65 255.91,114.17 1304.54,134.5 570.87,139.76 1305.12,181.1 556.1,187.01 1538.39,211.61 1358.27,227.36 43.31,239.17 292.32,244.09 1050.2,257.87 103.35,269.69 163.39,270.67 1051.18,302.17 485.24,305.12 285.43,307.09 1047.24,338.58 1310.04,365.16 467.52,374.02 1238.19,377.95 640.75,381.89 427.17,401.57 1272.64,402.56 1458.66,409.45 51.18,420.28 630.91,430.12 1506.89,434.06 1295.28,451.77 1539.37,470.47 1458.66,471.46 46.26,500 1503.94,500 1532.48,540.35 1455.71,551.18 39.37,577.76 442.91,627.95 592.52,635.83 1195.15,637.8 65.94,721.46 166.34,729.33 325.79,735.24 1537.4,768.7 260.83,787.4 318.9,793.31 273.62,868.11 1329.72,894.69 615.16,908.46 1304.13,926.18 263.78,928.15 955.71,949.8 1342.52,951.77 616.14,952.76
LED0: D2.2 U7.27 | length 1666.2
  Top Layer w7: v1(625.98,562.99) 636.81,552.17 ; U7.27@675.2,552.17 636.81,552.17 ; v1@1191.99,833.7 1191.99,834.7 1192.91,835.63 1192.91,799.21 ; 1204.73,789.25 cw(c1193.93,744.18) D2.2@1235.92,763.78 ; 1218.84,785.87 cw(c1210.74,752.03) D2.2@1242.27,766.75 ; D2.2@1220.8,778.44 cw(c1216,758.41) D2.2@1235.79,764.15 ; D2.2@1238.19,759.84 1232.28,759.84 1192.91,799.21 ; 636.81,552.17 cw(c645.53,560.89) 633.27,562.21 ccw(c645.53,560.89) 636.81,552.17 ; 636.81,552.17 ccw(c628.09,543.44) 626.77,555.71 cw(c628.09,543.44) 636.81,552.17 ; 1192.92,799.21 ccw(c1236.12,842.41) 1237.75,781.34 cw(c1236.12,842.41) 1192.92,799.21 ; v1@1188.72,824.54 cw(c1178.59,814.41) 1192.91,814.41 ccw(c1178.59,814.41) v1@1188.72,824.54 ; 1192.91,809.66 cw(c1213.96,809.66) 1199.08,824.54 ccw(c1213.96,809.66) 1192.91,809.66 ; 1204.43,787.7 ccw(c1236.72,819.99) 1237.94,774.34 cw(c1236.72,819.99) 1204.43,787.7 ; 1215.94,776.18 ccw(c1237.32,797.56) 1238.12,767.34 cw(c1237.32,797.56) 1215.94,776.18 ; 1217.73,774.39 cw(c1208.18,764.84) 1221.69,764.84 ccw(c1208.18,764.84) 1217.73,774.39
  Bottom Layer w7: 624.78,575.05 ccw(c633.36,570.1) v1@626.22,563.22 ; v1@625.81,570.32 ccw(c625.63,577.61) 631.95,573.96 ccw(c637.75,570.62) v1@632.13,566.98 ; v1(625.98,562.99) 632.87,569.88 632.87,720.67 751.56,839.36 1088.79,839.36 1105.11,823.04 1181.32,823.04 ; 629.43,583.11 ccw(c640.33,576.81) v1@631.26,568.07 ; 1174.09,826.46 cw(c1180.15,815.97) v1@1188.72,824.54 ; 1182,831.03 cw(c1186.83,822.65) v1@1193.67,829.49 ; v1@1191.99,833.7 1181.32,823.04 ; 1181.32,823.04 cw(c1185.91,818.45) 1189.66,823.75 ccw(c1185.91,818.45) 1181.32,823.04 ; v1@620.8,568.17 ccw(c591.66,597.31) 632.87,597.31 cw(c591.66,597.31) v1@620.8,568.17 ; v1@625.75,563.22 ccw(c608.56,580.41) 632.87,580.41 cw(c608.56,580.41) v1@625.75,563.22 ; 1160.07,823.04 ccw(c1160.07,863.55) 1188.72,834.91 cw(c1160.07,863.55) 1160.07,823.04 ; 1176.97,823.04 ccw(c1176.97,846.65) 1193.67,829.96 cw(c1176.97,846.65) 1176.97,823.04
  other v1: 1193.9,829.72
LED1: D3.2 U7.28 | length 1294.9
  Top Layer w7: v1@592.39,565.64 cw(c585.06,548.27) 603.27,553.15 ; v1(592.52,565.94) 592.52,561.02 621.06,532.48 U7.28@675.2,532.48 ; D3.2@1235.24,825.79 v1(1235.24,846.46) ; D3.2@1235.24,828.77 cw(c1252.92,828.77) 1240.42,841.28 ccw(c1252.92,828.77) D3.2@1235.24,828.77 ; D3.2@1235.24,828.77 ccw(c1217.55,828.77) 1230.06,841.28 cw(c1217.55,828.77) D3.2@1235.24,828.77 ; v1@599.85,565.94 ccw(c629.42,565.94) 608.51,545.04 cw(c629.42,565.94) v1@599.85,565.94
  Bottom Layer w7: v1(592.52,565.94) 616.14,589.57 616.14,722.32 747.85,854.03 1199.5,854.03 1199.8,854.33 ; 1214.66,850.74 ccw(c1221.69,862.23) v1@1230.46,852.01 ; 1222.87,845.72 ccw(c1228.27,854.56) v1@1235.02,846.7 ; v1@1227.92,846.03 ccw(c1218.94,845.5) 1223.63,853.18 ccw(c1227.94,860.22) v1@1231.8,852.93 ; v1(1235.24,846.46) 1227.36,854.33 1199.8,854.33 ; 605.03,578.45 cw(c592.52,590.96) 592.52,573.27 ccw(c592.52,590.96) 605.03,578.45 ; 605.03,578.45 ccw(c617.53,565.94) 599.85,565.94 cw(c617.53,565.94) 605.03,578.45 ; 1199.81,854.33 cw(c1199.81,812.76) 1229.93,841.41 ccw(c1199.81,812.76) 1199.81,854.33 ; 1216.12,854.33 cw(c1216.12,828.28) 1235,846.23 ccw(c1216.12,828.28) 1216.12,854.33
NetC10_2: C10.2 U1.14 | length 151
  Top Layer w7: C10.2@1007.87,766.73 U1.14@1060.04,766.73 ; C10.2@1016.24,768.1 cw(c1023.75,760.38) 1029.14,769.71 ; C10.2@1011.35,772.17 ccw(c1024.48,785.31) 1024.48,766.73 cw(c1024.48,785.31) C10.2@1011.35,772.17 ; C10.2@1016.3,777.12 ccw(c1041.38,802.21) 1041.38,766.73 cw(c1041.38,802.21) C10.2@1016.3,777.12
NetC11_1: C11.1 U2.10 | length 254.1
  Top Layer w7: C11.1@783.13,59.05 cw(c806.09,49.27) 799.63,73.38 ; C11.1@785.43,58.07 793.31,58.07 823.82,88.58 U2.10@823.82,134.84 ; C11.1@785.43,62.57 ccw(c785.43,92.45) 806.56,71.32 cw(c785.43,92.45) C11.1@785.43,62.57 ; C11.1@785.43,69.57 ccw(c785.43,116.35) 818.51,83.27 cw(c785.43,116.35) C11.1@785.43,69.57 ; C11.1@796.93,58.07 cw(c805.68,58.07) 799.49,64.26 ccw(c805.68,58.07) C11.1@796.93,58.07
NetC12_1: C12.1 U2.12 | length 656.5
  Top Layer w10: v1(719.49,99.41) 719.49,133.86 C12.1@721.45,135.83 ; 877.85,131.09 ccw(c886.38,141) v1@892.12,129.25 ; v1(894.68,124.02) 883.86,134.84 U2.12@863.19,134.84 ; 719.49,113.48 cw(c705.42,113.48) 715.37,103.53 ccw(c705.42,113.48) 719.49,113.48 ; 719.49,113.48 ccw(c733.55,113.48) 723.61,103.53 cw(c733.55,113.48) 719.49,113.48 ; U2.12@863.19,134.84 cw(c863.19,102.56) 889.87,120.74 ccw(c863.19,102.56) U2.12@863.19,134.84 ; 884.74,133.96 cw(c874.79,124.02) 888.86,124.02 ccw(c874.79,124.02) 884.74,133.96 ; 884.74,133.96 ccw(c894.68,143.91) 894.68,129.84 cw(c894.68,143.91) 884.74,133.96 ; 719.49,119.39 cw(c737.9,119.39) 724.88,132.4 ccw(c737.9,119.39) 719.49,119.39 ; 882.1,134.84 cw(c882.1,115.44) 898.13,126.37 ccw(c882.1,115.44) 882.1,134.84
  Bottom Layer w10: v1(719.49,99.41) 728.34,108.27 878.93,108.27 v1(894.68,124.02) ; v1@722.11,104.61 ccw(c730.9,122.03) 740.66,105.13 ; 884.74,114.07 cw(c894.68,104.12) 894.68,118.19 ccw(c894.68,104.12) 884.74,114.07 ; 884.74,114.07 ccw(c874.79,124.02) 888.86,124.02 cw(c874.79,124.02) 884.74,114.07 ; v1@716.54,102.36 cw(c730.8,88.1) 730.8,108.27 ccw(c730.8,88.1) v1@716.54,102.36 ; v1@723.61,95.29 cw(c754.94,63.96) 754.94,108.27 ccw(c754.94,63.96) v1@723.61,95.29
NetC12_2: C12.2 U2.8 | length 165.6
  Top Layer w7: C12.2@678.15,135.83 678.15,151.58 690.94,164.37 U2.8@774.61,164.37 ; 678.15,151.14 cw(c662.84,151.14) 673.66,140.31 ccw(c662.84,151.14) 678.15,151.14 ; 678.15,151.14 ccw(c693.46,151.14) 682.63,140.31 cw(c693.46,151.14) 678.15,151.14
NetC23_2: C23.2 U4.14 | length 157.4
  Top Layer w7: C23.2@1088.58,558.07 C23.2@1095.47,551.18 ; C23.2@1095.47,558.07 C23.2@1095.47,551.18 ; C23.2@1095.78,558.65 cw(c1087.3,542.81) 1104.66,547.46 ; U4.14@1138.78,529.53 1117.12,529.53 C23.2@1095.47,551.18 ; C23.2@1094.82,558.07 ccw(c1109.86,558.07) 1099.22,547.43 cw(c1109.86,558.07) C23.2@1094.82,558.07 ; C23.2@1101.82,558.07 ccw(c1133.76,558.07) 1111.17,535.48 cw(c1133.76,558.07) C23.2@1101.82,558.07
NetC24_1: C24.1 U6.11 | length 131.6
  Top Layer w7: C24.1@1086.61,328.74 1086.61,267.72 U6.11@1088.58,265.75 ; 1086.61,313.43 cw(c1101.93,313.43) 1091.1,324.25 ccw(c1101.93,313.43) 1086.61,313.43 ; 1086.61,313.43 ccw(c1071.3,313.43) 1082.13,324.25 cw(c1071.3,313.43) 1086.61,313.43 ; 1086.61,290.09 ccw(c1099.14,290.09) 1090.28,281.23 cw(c1099.14,290.09) 1086.61,290.09
NetC32_2: C32.2 U7.4 | length 230.9
  Top Layer w7: C32.2@712.12,340.07 cw(c729.83,336.44) C32.2@725.15,353.9 ; C32.2@715.07,337.12 ccw(c711.44,354.83) C32.2@728.9,350.15 ; C32.2@715.55,340.55 763.78,388.78 U7.4@763.78,424.21 ; 734.2,359.2 cw(c714.57,378.83) 714.57,351.07 ccw(c714.57,378.83) 734.2,359.2 ; 734.2,359.2 ccw(c753.83,339.57) 726.07,339.57 cw(c753.83,339.57) 734.2,359.2
NetD2_1: D2.1 R3.2 | length 291.1
  Top Layer w10: R3.2@1308.07,698.82 1316.93,707.68 D2.1@1316.93,759.84 ; R3.2@1312.61,700.5 cw(c1332.74,707.97) 1314.15,718.7 ; 1316.93,718.63 cw(c1353.14,718.63) 1327.54,744.23 ccw(c1353.14,718.63) 1316.93,718.63 ; 1316.93,718.63 ccw(c1280.72,718.63) 1306.32,744.23 cw(c1280.72,718.63) 1316.93,718.63 ; R3.2@1304.65,702.24 ccw(c1275,731.89) 1316.93,731.89 cw(c1275,731.89) R3.2@1304.65,702.24 ; R3.2@1311.72,695.17 ccw(c1299.14,707.75) 1316.93,707.75 cw(c1299.14,707.75) R3.2@1311.72,695.17
NetD3_1: D3.1 R4.2 | length 633.4
  Top Layer w10: D3.1@1309.58,818.4 ccw(c1340.78,835.37) D3.1@1331.59,801.07 ; R4.2@1310.04,654.53 1356.3,654.53 1375,673.23 1375,776.57 1325.79,825.79 D3.1@1313.98,825.79 ; D3.1@1318.37,823.18 ccw(c1369.03,850.75) 1354.1,795.04 ; D3.1@1321.48,807.8 cw(c1331.34,790.72) 1336.44,809.77 ; D3.1@1313.98,825.79 cw(c1313.98,797.27) 1334.14,817.44 ccw(c1313.98,797.27) D3.1@1313.98,825.79 ; 1321.73,654.53 cw(c1321.73,666.22) 1313.46,657.95 ccw(c1321.73,666.22) 1321.73,654.53 ; 1321.73,654.53 ccw(c1321.73,642.84) 1313.46,651.1 cw(c1321.73,642.84) 1321.73,654.53 ; D3.1@1313.98,805.79 cw(c1313.98,728.99) 1368.28,783.29 ccw(c1313.98,728.99) D3.1@1313.98,805.79 ; D3.1@1313.98,815.79 cw(c1313.98,763.13) 1351.21,800.36 ccw(c1313.98,763.13) D3.1@1313.98,815.79
NetD21_2: D21.2 R78.1 | length 131.3
  Top Layer w20: D21.2@232.45,676.57 cw(c184.41,623.62) R78.1@255.91,623.62 ; D21.2@245.89,691.38 cw(c225.38,668.78) D21.2@255.91,668.78 ; R78.1@255.91,625.98 D21.2@255.91,672.24
NetR6_1: R6.1 U7.31 | length 129.1
  Top Layer w7: R6.1@597.44,465.55 620.08,465.55 627.95,473.43 U7.31@675.2,473.43 ; R6.1@599.96,462.05 cw(c608.41,453.6) 608.41,465.55 ccw(c608.41,453.6) R6.1@599.96,462.05 ; R6.1@599.96,471.02 ccw(c613.16,484.22) 613.16,465.55 cw(c613.16,484.22) R6.1@599.96,471.02